# EAGLE board Bolt (EAGLE 9.6.2)
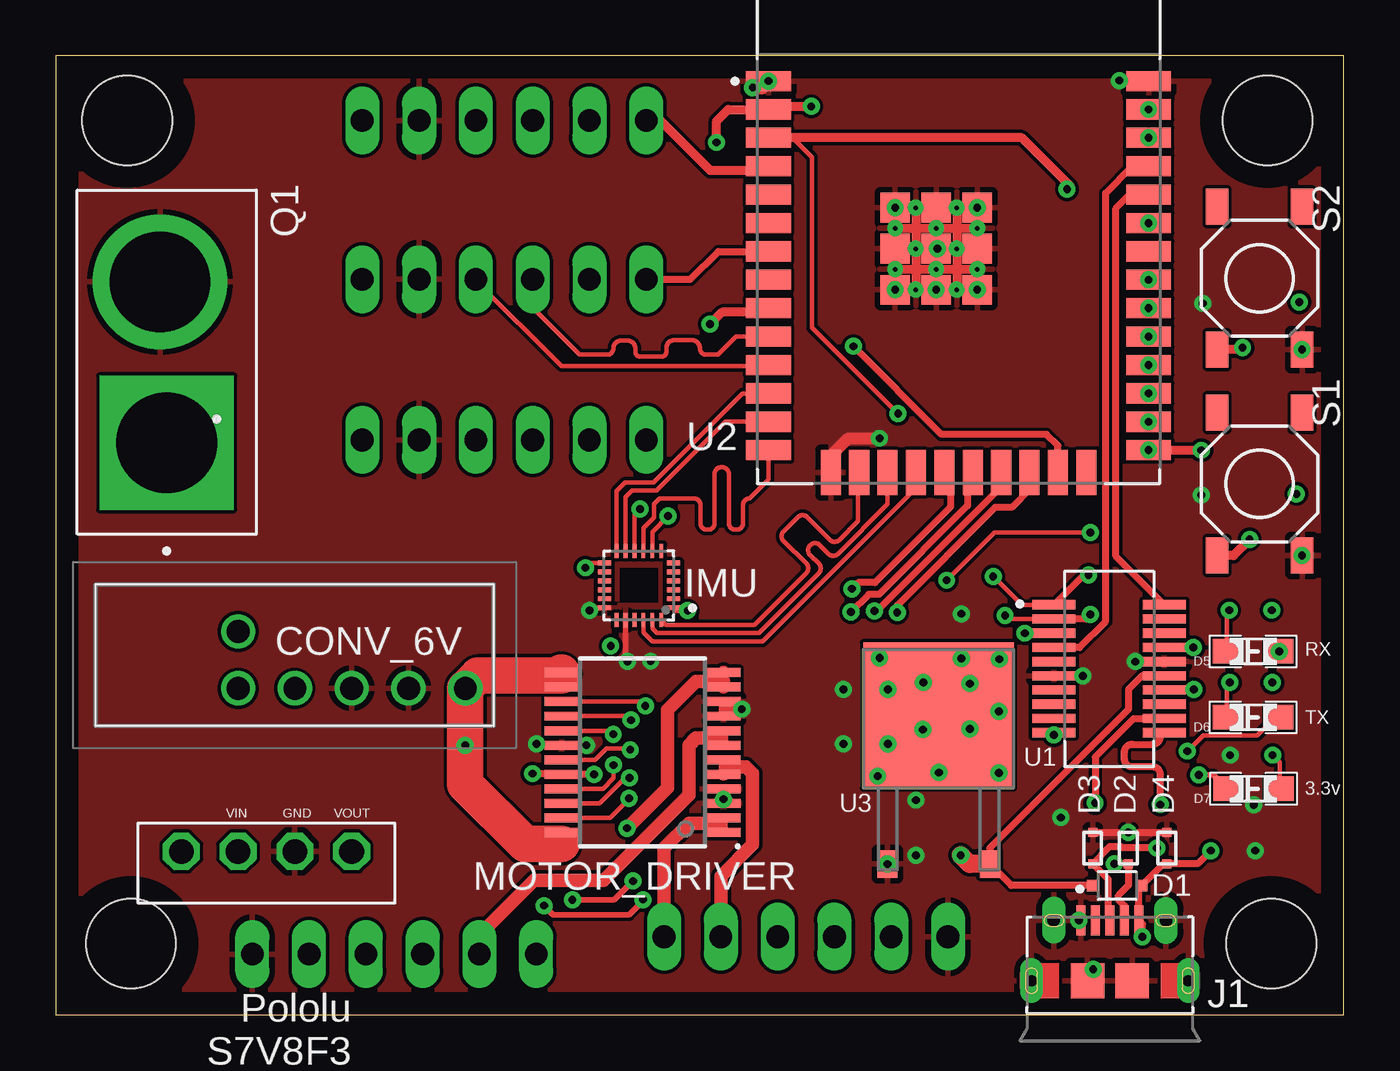
[diagram p0: board, top side]
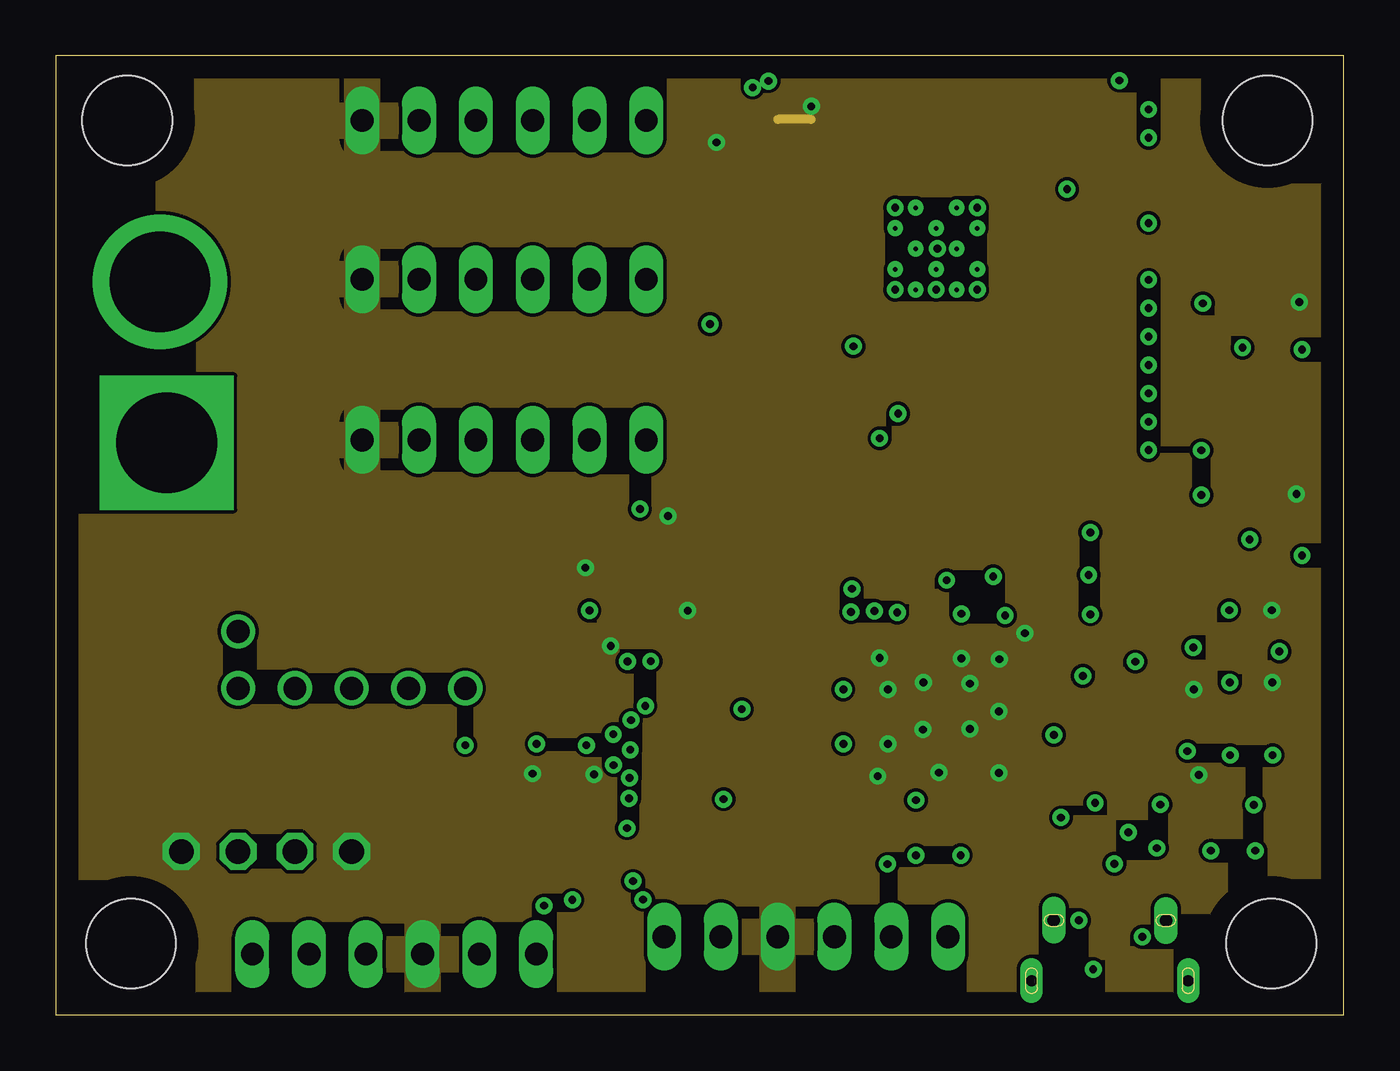
[diagram p1: board, inner layer VCC]
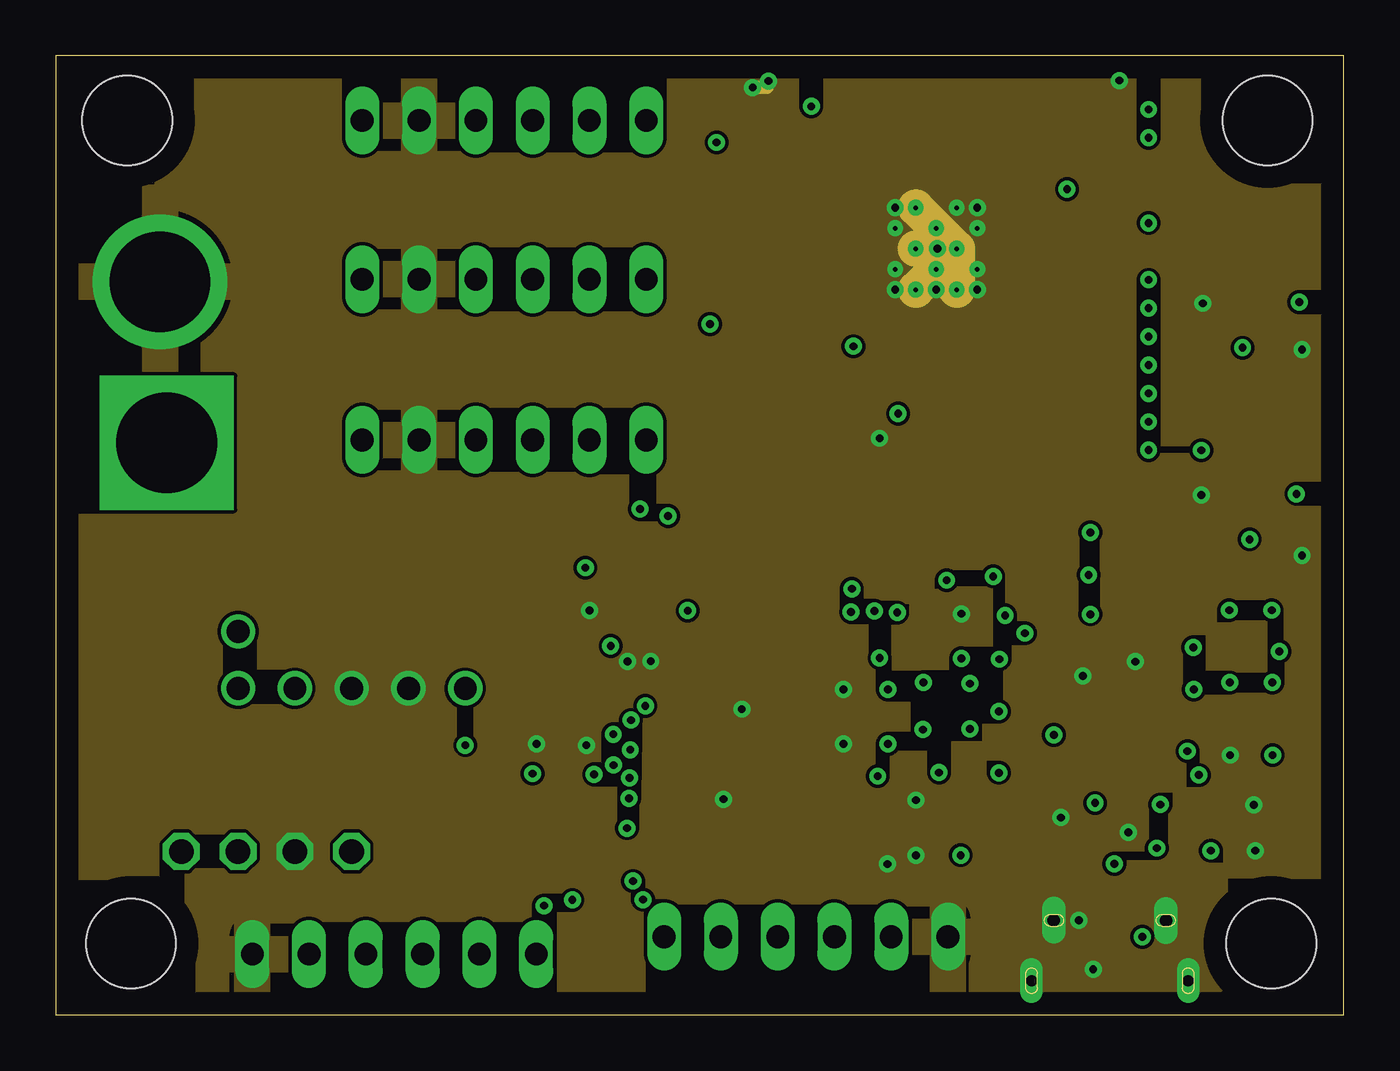
[diagram p2: board, inner layer GND]
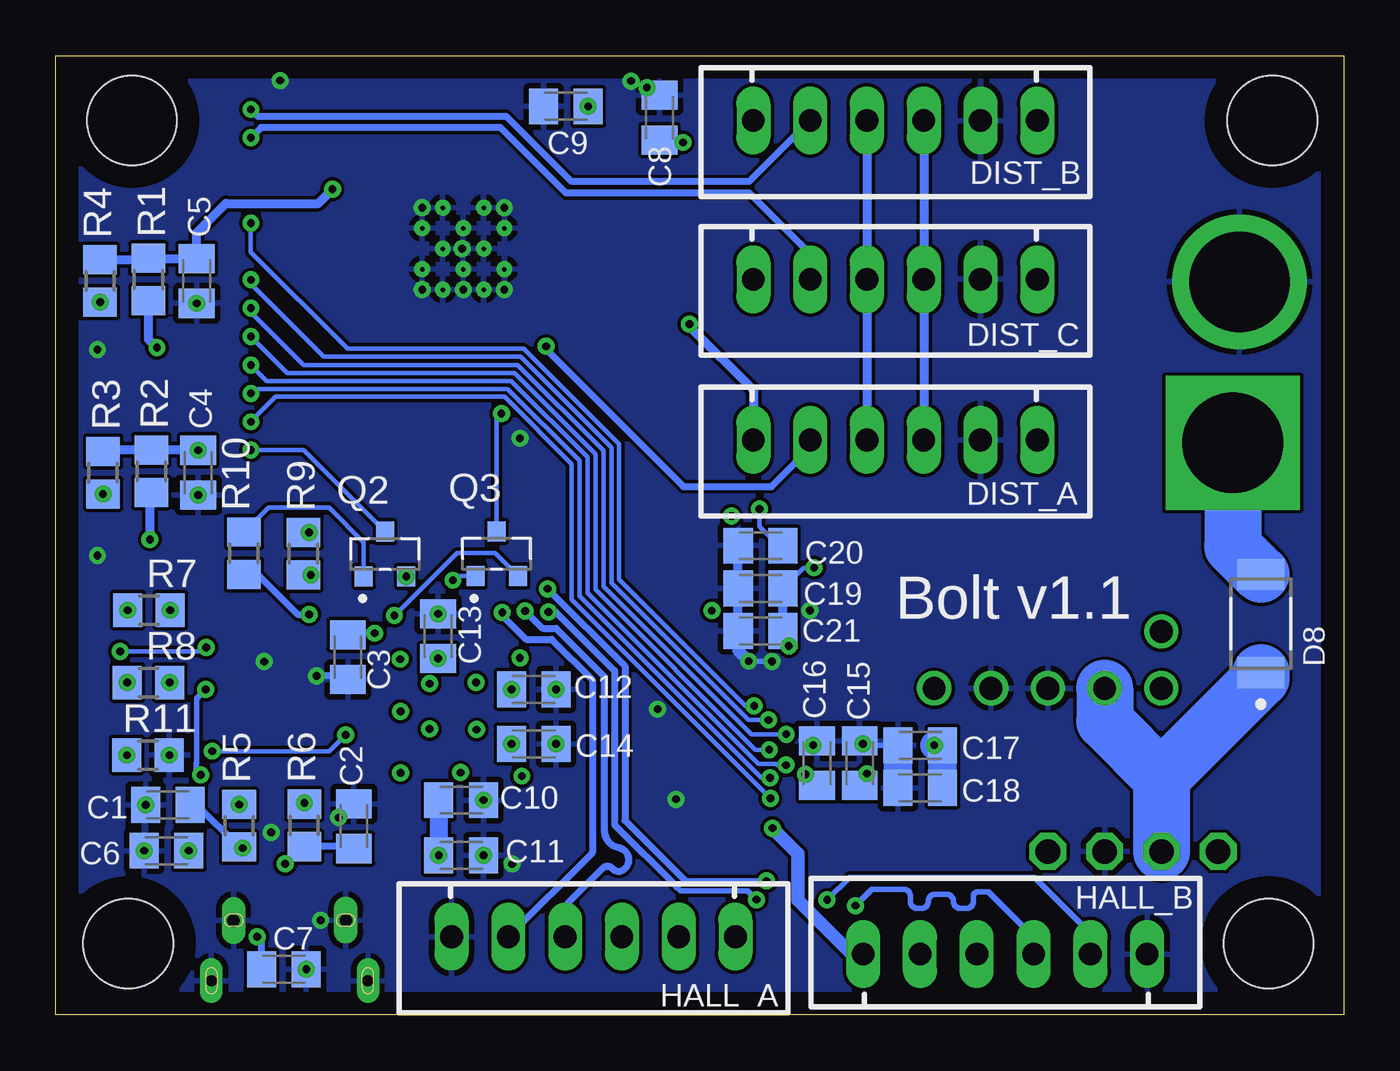
[diagram p3: board, bottom side, seen from below]

Size 57.59 x 42.9 mm. Coordinates in mm from the lower left corner, seen from the top.
Outline: 0,0 57.59,0 57.59,42.9 0,42.9 0,0
Copper layers (1+2*15+16): Top 0.035mm / dielectric 1.5mm / VCC 0.035mm / dielectric 0.15mm / GND 0.035mm / dielectric 0.2mm / Bottom 0.035mm
Design rules "default *": minimum track width 6mil, minimum drill 0.2mm, track to track 6mil, track to pad 6mil, pad to pad 6mil, via to via 6mil, smd to smd 6mil, copper to edge 40mil, drill to drill 6mil, minimum pad ring 10mil, minimum via ring 8mil, stop-mask expansion 4mil, vias tented up to drill 0mil, thermal gap 10mil
Holes 4 mm at 3.35,3.19 3.19,40.01 54.19,40.01 54.35,3.19

## Footprints (pad centres in the part's own frame; a part is rotated, then mirrored left to right if it is on the bottom)
C0805K = smd 1.3 x 1.6: 1 -1,0; 2 1,0
S7V8F3 = drill 1.1 octagon: !SHDN 3.81,0; GND -1.27,0; VIN 1.27,0; VOUT -3.81,0
D36V28FX = drill 1.02 pad 1.53: 1 0,0; 2 0,-2.54; 3 2.54,-2.54; 4 5.08,-2.54; 5 7.62,-2.54; 6 10.16,-2.54
SOD323(F) = smd 0.5 x 0.5: 1 1.1,0; 2 -1.1,0
SOD-523 = smd 0.4 x 0.4: P$1 0,-0.5; P$2 1.4,-0.5
0805.LED = smd 1.25 x 1.1: P$1 -1.175,0; P$2 1.175,0
NEXPERIA_PMEG3050EP,115_0 = smd 1.4 x 2.1: 1 -2.2,0; 2 2.2,0
JST-XH-06-PACKAGE-LONG-PAD = drill 1.016 long: 1 -6.35,0; 2 -3.81,0; 3 -1.27,0; 4 1.27,0; 5 3.81,0; 6 6.35,0
QFN40P300X300X105-24N = smd 0.64 x 0.22: 1 -1.545,1; 2 -1.545,0.6; 3 -1.545,0.2; 4 -1.545,-0.2; 5 -1.545,-0.6; 6 -1.545,-1; 13 1.545,-1; 14 1.545,-0.6; 15 1.545,-0.2; 16 1.545,0.2; 17 1.545,0.6; 18 1.545,1 | smd 0.22 x 0.64: 7 -1,-1.545; 8 -0.6,-1.545; 9 -0.2,-1.545; 10 0.2,-1.545; 11 0.6,-1.545; 12 1,-1.545; 19 1,1.545; 20 0.6,1.545; 21 0.2,1.545; 22 -0.2,1.545; 23 -0.6,1.545; 24 -1,1.545
AMPHENOL_10118194-0001LF = smd 0.4 x 1.35: 1 -1.3,2.7; 2 -0.65,2.7; 3 0,2.7; 4 0.65,2.7; 5 1.3,2.7 | drill 0.55 pad 0.65 long: S1 -2.511,2.706; S2 2.514,2.697 | drill 0.5 pad 0.775 long: S3 -3.5,0; S6 3.5,0 | smd 1.5 x 1.55: S4 -1,0; S5 1,0
SOP65P760X160-24N = smd 1.5 x 0.4: 1 -3.625,3.575; 2 -3.625,2.925; 3 -3.625,2.275; 4 -3.625,1.625; 5 -3.625,0.975; 6 -3.625,0.325; 7 -3.625,-0.325; 8 -3.625,-0.975; 9 -3.625,-1.625; 10 -3.625,-2.275; 11 -3.625,-2.925; 12 -3.625,-3.575; 13 3.625,-3.575; 14 3.625,-2.925; 15 3.625,-2.275; 16 3.625,-1.625; 17 3.625,-0.975; 18 3.625,-0.325; 19 3.625,0.325; 20 3.625,0.975; 21 3.625,1.625; 22 3.625,2.275; 23 3.625,2.925; 24 3.625,3.575
AMASS_XT60PB-M = drill 4.5 pad 6 square: 1 -3.6,0 | drill 4.5 pad 6: 2 3.6,0.305
TRANS_MMSS8050-H-TP = smd 0.9 x 0.8: 1 -1,0.95; 2 -1,-0.95; 3 1,0
R0805 = smd 1.3 x 1.5: 1 -0.95,0; 2 0.95,0
SM08 = smd 1.6 x 1: 1 -3.2,1.9; 2 3.2,1.9; 3 -3.2,-1.9; 4 3.2,-1.9
SOP63P599X175-20N = smd 1.97 x 0.41: 1 -2.47,2.857; 2 -2.47,2.223; 3 -2.47,1.587; 4 -2.47,0.953; 5 -2.47,0.318; 6 -2.47,-0.318; 7 -2.47,-0.953; 8 -2.47,-1.587; 9 -2.47,-2.223; 10 -2.47,-2.857; 11 2.47,-2.857; 12 2.47,-2.223; 13 2.47,-1.587; 14 2.47,-0.953; 15 2.47,-0.318; 16 2.47,0.318; 17 2.47,0.953; 18 2.47,1.587; 19 2.47,2.223; 20 2.47,2.857
MODULE_ESP32-WROOM-32D = smd 2 x 0.9: 1 -8.5,5.26; 2 -8.5,3.99; 3 -8.5,2.72; 4 -8.5,1.45; 5 -8.5,0.18; 6 -8.5,-1.09; 7 -8.5,-2.36; 8 -8.5,-3.63; 9 -8.5,-4.9; 10 -8.5,-6.17; 11 -8.5,-7.44; 12 -8.5,-8.71; 13 -8.5,-9.98; 14 -8.5,-11.25; 25 8.5,-11.25; 26 8.5,-9.98; 27 8.5,-8.71; 28 8.5,-7.44; 29 8.5,-6.17; 30 8.5,-4.9; 31 8.5,-3.63; 32 8.5,-2.36; 33 8.5,-1.09; 34 8.5,0.18; 35 8.5,1.45; 36 8.5,2.72; 37 8.5,3.99; 38 8.5,5.26 | smd 0.9 x 2: 15 -5.715,-12.25; 16 -4.445,-12.25; 17 -3.175,-12.25; 18 -1.905,-12.25; 19 -0.635,-12.25; 20 0.635,-12.25; 21 1.905,-12.25; 22 3.175,-12.25; 23 4.445,-12.25; 24 5.715,-12.25 | smd 1.33 x 1.33: 39_1 -2.835,-0.405; 39_2 -1,-0.405; 39_3 0.835,-0.405; 39_4 -2.835,-2.24; 39_5 -1,-2.24; 39_6 0.835,-2.24; 39_7 -2.835,-4.075; 39_8 -1,-4.075; 39_9 0.835,-4.075 | drill 0.2 pad 0.3: 39_10 -1.917,-0.405; 39_11 -0.083,-0.405; 39_12 -2.835,-1.323; 39_13 -1,-1.323; 39_14 0.835,-1.323; 39_15 -1.917,-2.24; 39_16 -0.083,-2.24; 39_17 -2.835,-3.158; 39_18 -1,-3.158; 39_19 0.835,-3.158; 39_20 -1.917,-4.075; 39_21 -0.083,-4.075
TO228P970X238-3N = smd 0.889 x 1.219: 1 -2.286,-6.502; 3 2.286,-6.502 | smd 6.731 x 6.502: 2 0,0.152

## Placement (x,y rotation side)
C1  47pF  [C0805K]  52.58,9.4 180 bottom
C2  47pF  [C0805K]  44.27,8.44 90 bottom
C3  0.1uF  [C0805K]  44.53,16 270 bottom
C4  1nF  [C0805K]  51.23,24.26 270 bottom
C5  1nF  [C0805K]  51.29,32.83 270 bottom
C6  10uF  [C0805K]  52.65,7.35 180 bottom
C7  0.1uF  [C0805K]  47.39,2.04 0 bottom
C8  0.1uF  [C0805K]  30.59,40.13 90 bottom
C9  22uF  [C0805K]  34.78,40.64 180 bottom
C10  1uF  [C0805K]  39.47,9.61 0 bottom
C11  10uF  [C0805K]  39.47,7.14 0 bottom
C12  0.1uF  [C0805K]  36.21,14.56 0 bottom
C13  1uF  [C0805K]  40.49,16.94 90 bottom
C14  47uF  [C0805K]  36.21,12.12 0 bottom
C15  0.1uF  [C0805K]  21.64,11.27 90 bottom
C16  10uF  [C0805K]  23.55,11.27 90 bottom
C17  0.1uF  [C0805K]  18.94,12.06 180 bottom
C18  10uF  [C0805K]  18.94,10.15 180 bottom
C19  0.1uF  [C0805K]  26.08,19.08 180 bottom
C20  0.1uF  [C0805K]  26.08,20.99 180 bottom
C21  10nF  [C0805K]  26.08,17.18 180 bottom
CONV_3V3  S7V8F3  [S7V8F3]  9.42,7.31 180 top
CONV_6V  D36V28FX  [D36V28FX]  8.15,17.15 0 top
D1  BAT760,115  [SOD323(F)]  47.46,5.79 180 top
D2  ESD5B5.0ST1G  [SOD-523]  47.47,6.76 90 top
D3  ESD5B5.0ST1G  [SOD-523]  45.87,6.76 90 top
D4  ESD5B5.0ST1G  [SOD-523]  49.19,6.76 90 top
D5  RX  [0805.LED]  53.55,16.26 0 top
D6  TX  [0805.LED]  53.55,13.31 0 top
D7  3.3V  [0805.LED]  53.56,10.12 0 top
D8  NEXPERIA_PMEG3050EP,115NEXPERIA_PMEG3050EP,115_0_0  [NEXPERIA_PMEG3050EP,115_0]  3.7,17.5 90 bottom
DIST_A  JST-XH-06-PIN-LONG-PAD  [JST-XH-06-PACKAGE-LONG-PAD]  20.05,25.72 180 bottom
DIST_B  JST-XH-06-PIN-LONG-PAD  [JST-XH-06-PACKAGE-LONG-PAD]  20.05,40.01 180 bottom
DIST_C  JST-XH-06-PIN-LONG-PAD  [JST-XH-06-PACKAGE-LONG-PAD]  20.05,32.91 180 bottom
HALL_A  JST-XH-06-PIN-LONG-PAD  [JST-XH-06-PACKAGE-LONG-PAD]  33.55,3.5 180 bottom
HALL_B  JST-XH-06-PIN-LONG-PAD  [JST-XH-06-PACKAGE-LONG-PAD]  15.13,2.72 0 bottom
IMU  MPU-9250  [QFN40P300X300X105-24N]  26.08,19.21 180 top
J1  10118194-0001LF  [AMPHENOL_10118194-0001LF]  47.14,1.53 0 top
MOTOR_DRIVER  TB6612FNG(O,C,8,EL  [SOP65P760X160-24N]  26.24,11.74 180 top
Q1  XT60_YELLOW  [AMASS_XT60PB-M]  4.96,29.19 90 top
Q2  MMSS8050-H-TP  [TRANS_MMSS8050-H-TP]  42.87,20.62 90 bottom
Q3  MMSS8050-H-TP  [TRANS_MMSS8050-H-TP]  37.88,20.63 90 bottom
R1  220R  [R0805]  53.45,32.89 270 bottom
R2  220R  [R0805]  53.32,24.32 270 bottom
R3  10K  [R0805]  55.48,24.26 90 bottom
R4  10K  [R0805]  55.61,32.83 90 bottom
R5  27R  [R0805]  49.39,8.46 90 bottom
R6  27R  [R0805]  46.49,8.48 90 bottom
R7  10K  [R0805]  53.42,18.1 0 bottom
R8  10K  [R0805]  53.45,14.87 0 bottom
R9  10K  [R0805]  46.52,20.64 270 bottom
R10  10K  [R0805]  49.17,20.65 90 bottom
R11  1K  [R0805]  53.47,11.62 180 bottom
S1  PTS525SM08  [SM08]  53.83,23.75 90 top
S2  PTS525SM08  [SM08]  53.83,32.96 90 top
U1  FT231XS-R  [SOP63P599X175-20N]  47.1,15.49 0 top
U2  ESP32-WROOM-32D  [MODULE_ESP32-WROOM-32D]  40.37,36.51 0 top
U3  LM1117DT-3.3/NOPB  [TO228P970X238-3N]  39.48,13.25 0 top

## Library data of the parts
C1-C21 = rcl; SPICEPREFIX: C
CONV_3V3 = Pololu_S7V8F3
CONV_6V = D36V28FX; DESCRIPTION: 5V, 3.2A Step-Down Voltage Regulator D36V28F5; HEIGHT: 8.77mm; MANUFACTURER_NAME: POLOLU ROBOTICS & ELECTRONICS; MANUFACTURER_PART_NUMBER: D36V28FX
D1 = BAT760_115; AVAILABILITY: Good; DESCRIPTION: Diode Schottky 20V 1A (DC) Surface Mount SOD-323; MF: Nexperia USA; MP: BAT760,115; PACKAGE: SOD323-2 Nexperia USA Inc.; PRICE: None; PURCHASE-URL: https://pricing.snapeda.com/search/part/BAT760,115/?ref=eda
D2-D4 = ESD5B5.0ST1G; AVAILABILITY: Good; DESCRIPTION: Diode Schottky 20V 1A (DC) Surface Mount SOD-323; MF: Nexperia USA; MP: BAT760,115; PACKAGE: SOD323-2 Nexperia USA Inc.; PRICE: None; PURCHASE-URL: https://pricing.snapeda.com/search/part/BAT760,115/?ref=eda
D5-D7 = leds
D8 = Nexperia - PMEG3050EP,115; AMBIENT_TEMPERATURE_RANGE_HIGH: +150°C; AMBIENT_TEMPERATURE_RANGE_LOW: -55°C; CENTROID_NOT_SPECIFIED: No; DATASHEET: https://assets.nexperia.com/documents/data-sheet/PMEG3050EP.pdf; DEVICE_CLASS_L1: Discrete Semiconductors; DEVICE_CLASS_L2: Diodes; DEVICE_CLASS_L3: Schottky Diodes; DIGIKEY_DESCRIPTION: DIODE SCHOTTKY 30V 5A SOD128; DIGIKEY_PART_NUMBER: 1727-5317-1-ND; FORWARD_CURRENT: 5A; HEIGHT: 1.1mm; LEAD_FREE: yes; MAX_JUNCTION_TEMP: +150°C; MAX_SURGE_FORWARD_CURRENT: 70A; MF: Nexperia; MFG_PACKAGE_IDENT: SOD128; MFG_PACKAGE_IDENT_DATE: 06/2017; MFG_PACKAGE_IDENT_REV: 0; MOUSER_PART_NUMBER: 771-PMEG3050EP115; MPN: PMEG3050EP,115; PACKAGE: CFP5; PEAK_REVERSE_CURRENT: 8mA; PREFIX: D; REVERSE_VOLTAGE: 30V; ROHS: yes; VERIFICATION_VERSION: 0.0.0.1
DIST_A DIST_B DIST_C HALL_A HALL_B = Rembrandt Electronics - JST XH Connectors v1-0
IMU = MPU-9250; AVAILABILITY: Bad; DESCRIPTION: Accelerometer, Gyroscope, Magnetometer, 9 Axis Sensor I²C, SPI Output; MF: TDK InvenSense; MP: MPU-9250; PACKAGE: TFQFN-24 TDK InvenSense; PRICE: None
J1 = 10118194-0001LF; AVAILABILITY: Good; DESCRIPTION: USB - micro B USB 2.0 Receptacle Connector 5 Position Surface Mount, Right Angle; Through Hole; MF: Amphenol ICC (FCI); MP: 10118194-0001LF; PACKAGE: None; PRICE: None; PURCHASE-URL: https://pricing.snapeda.com/search/part/10118194-0001LF/?ref=eda
MOTOR_DRIVER = TB6612FNG_O_C_8_EL; AVAILABILITY: Good; DESCRIPTION: Motor Driver Power MOSFET Parallel 24-SSOP; MF: Toshiba; MP: TB6612FNG(O,C,8,EL; PACKAGE: SSOP-24 Toshiba; PRICE: None
Q1 = XT60_YELLOW; AVAILABILITY: Unavailable; DESCRIPTION: Power connector; 65A; PIN: 2; Colour: yellow; MF: Pololu; MP: XT60 YELLOW; PACKAGE: None; PRICE: None
Q2 Q3 = MMSS8050-H-TP; AVAILABILITY: Good; DESCRIPTION: Bipolar (BJT) Transistor NPN 25V 1.5A 100MHz 625mW Surface Mount SOT-23; MF: Micro Commercial; MP: MMSS8050-H-TP; PACKAGE: SOT-23 MCC; PRICE: None; PURCHASE-URL: https://pricing.snapeda.com/search/part/MMSS8050-H-TP/?ref=eda
R1-R11 = rcl; SPICEPREFIX: R
S1 S2 = pts525_20; MF: C&K Components; MPN: PTS525SM08SMTR2LFS; OC_FARNELL: unknown; OC_NEWARK: unknown
U1 = FT231XS-R; DESCRIPTION: USB Bridge, USB to UART USB 2.0 UART Interface 20-SSOP; DIGI-KEY_PART_NUMBER: 768-1129-1-ND; MF: FTDI,; MP: FT231XS-R; PACKAGE: SSOP-20 FTDI; PURCHASE-URL: https://pricing.snapeda.com/search/part/FT231XS-R/?ref=eda
U2 = ESP32-WROOM-32D; AVAILABILITY: Bad; DESCRIPTION: Bluetooth, WiFi 802.11b/g/n, Bluetooth v4.2 +EDR, Class 1, 2 and 3 Transceiver Module 2.4GHz ~ 2.5GHz Integrated, Trace Surface Mount; MF: Espressif Systems; MP: ESP32-WROOM-32D; PACKAGE: Module Espressif Systems; PRICE: None
U3 = LM1117DT-3.3_NOPB; AVAILABILITY: Good; DESCRIPTION: 800-mA 15-V linear voltage regulator 3-TO-252 0 to 125; MF: Texas Instruments; MP: LM1117DT-3.3/NOPB; PACKAGE: TO-252-3 Texas Instruments; PRICE: None; PURCHASE-URL: https://pricing.snapeda.com/search/part/LM1117DT-3.3/NOPB/?ref=eda

## Nets
3V3OUT: U1.13
6V: C17.1 C18.1 CONV_6V.6 MOTOR_DRIVER.13 MOTOR_DRIVER.14 MOTOR_DRIVER.24
BAT: D8.2 Q1.1
DIST_GPIO1_A: DIST_A.6 U2.9
DIST_GPIO1_B: DIST_B.6 U2.4
DIST_GPIO1_C: DIST_C.6 U2.7
DIST_XSHUT_A: DIST_A.5 U2.23
DIST_XSHUT_B: DIST_B.5 U2.37
DIST_XSHUT_C: DIST_C.5 U2.36
DTR: Q2.2 R9.2 U1.1
EN: C5.1 Q3.3 R1.1 R4.2 U2.3
EXT_5V: C10.1 C11.1 D1.1 U1.15 U3.3
GND: C1.2 C2.2 C3.2 C4.2 C5.2 C6.2 C7.2 C8.2 C9.2 C10.2 C11.2 C12.2 C13.2 C14.2 C15.2 C16.2 C17.2 C18.2 C19.2 C20.2 C21.2 CONV_3V3.GND CONV_6V.4 CONV_6V.5 D2.P$2 D3.P$2 D4.P$2 DIST_A.2 DIST_B.2 DIST_C.2 HALL_A.6 HALL_B.6 IMU.18 IMU.20 J1.1 J1.S1 J1.S2 J1.S3 J1.S4 J1.S5 J1.S6 MOTOR_DRIVER.3 MOTOR_DRIVER.4 MOTOR_DRIVER.9 MOTOR_DRIVER.10 MOTOR_DRIVER.18 Q1.2 R11.1 S1.3 S2.3 U1.6 U1.16 U2.1 U2.15 U2.38 U2.39_1 U2.39_2 U2.39_3 U2.39_4 U2.39_5 U2.39_6 U2.39_7 U2.39_8 U2.39_9 U2.39_10 U2.39_11 U2.39_12 U2.39_13 U2.39_14 U2.39_15 U2.39_16 U2.39_17 U2.39_18 U2.39_19 U2.39_20 U2.39_21 U3.1
HALL_1_A: HALL_A.4 U2.21
HALL_1_B: HALL_B.4 U2.20
HALL_2_A: HALL_A.5 U2.22
HALL_2_B: HALL_B.5 U2.19
I2C_SCL: DIST_A.4 DIST_B.4 DIST_C.4 U2.10
I2C_SDA: DIST_A.3 DIST_B.3 DIST_C.3 U2.11
IMU_CLK: IMU.23 U2.17
IMU_CS: IMU.22 U2.18
IMU_FSYNC: IMU.11 U2.13
IMU_INT: IMU.12 U2.12
IMU_SDI: IMU.24 U2.16
IMU_SDO: IMU.9 U2.14
IO0: C4.1 Q2.3 R2.1 R3.2 U2.25
M1_A: HALL_A.1 MOTOR_DRIVER.1 MOTOR_DRIVER.2
M1_B: HALL_B.1 MOTOR_DRIVER.11 MOTOR_DRIVER.12
M2_A: HALL_A.2 MOTOR_DRIVER.5 MOTOR_DRIVER.6
M2_B: HALL_B.2 MOTOR_DRIVER.7 MOTOR_DRIVER.8
M_DRV_AIN1: MOTOR_DRIVER.21 U2.28
M_DRV_AIN2: MOTOR_DRIVER.22 U2.27
M_DRV_BIN1: MOTOR_DRIVER.17 U2.30
M_DRV_BIN2: MOTOR_DRIVER.16 U2.31
M_DRV_PWMA: MOTOR_DRIVER.23 U2.26
M_DRV_PWMB: MOTOR_DRIVER.15 U2.33
M_DRV_STBY: MOTOR_DRIVER.19 U2.29
N$1: Q2.1 R10.2
N$28: D7.P$2 R11.2
N$35: D5.P$1 R7.2
N$55: R5.2 U1.11
N$56: R6.2 U1.12
N$61: R2.2 S1.1
N$62: R1.2 S2.1
N$124: Q3.1 R9.1
N$126: D5.P$2 U1.17
N$127: D6.P$2 U1.10
N$129: D6.P$1 R8.2
REGOUT: C20.1 IMU.10
RTS: Q3.2 R10.1 U1.2
RXD0: U1.20 U2.34
TXD0: U1.4 U2.35
USB_5V: C6.1 C7.1 D1.2 D4.P$1 J1.5
USB_DM: C2.1 D2.P$1 J1.4 R6.1
USB_DP: C1.1 D3.P$1 J1.3 R5.1
V_BAT: CONV_3V3.VIN CONV_6V.3 D8.1
VCC: C3.1 C8.1 C9.1 C12.1 C13.1 C14.1 C15.1 C16.1 C19.1 C21.1 CONV_3V3.!SHDN CONV_3V3.VOUT D7.P$1 DIST_A.1 DIST_B.1 DIST_C.1 HALL_A.3 HALL_B.3 IMU.1 IMU.8 IMU.13 MOTOR_DRIVER.20 R3.1 R4.1 R7.1 R8.1 U1.3 U1.14 U2.2 U3.2

## Tracks (layer width: path | path; a pad name or v marks a point on that pad's centre or on a via)
6V  (via drill 0.35)
  Top 0.508: MOTOR_DRIVER.24 22.61,7.65 | MOTOR_DRIVER.14 MOTOR_DRIVER.13
  Top 1.626: 22.61,7.65 20.97,7.65 18.31,10.31 v18.31,12.06 CONV_6V.6 18.88,15.18 22.61,15.18 MOTOR_DRIVER.13
  Bottom 1.27: C18.1 C17.1 17.94,12.06 v18.31,12.06
BAT
  Bottom 2.54: Q1.1 4.96,20.96 D8.2
DIST_GPIO1_A  (via drill 0.35)
  Top 0.406: U2.9 31.69,31.43 29.79,31.43 v29.26,30.9
  Bottom 0.406: v29.26,30.9 29.26,30.8 26.4,27.94 DIST_A.6
DIST_GPIO1_B
  Top 0.406: DIST_B.6 27.04,40.01 29.26,37.78 31.69,37.78 U2.4
DIST_GPIO1_C
  Top 0.305: DIST_C.6 28.38,32.91 29.63,34.15 U2.7
DIST_XSHUT_A  (via drill 0.35)
  Top 0.305: U2.23 44.81,25.46 44.31,25.97 39.61,25.97 v35.67,29.91
  Bottom 0.305: DIST_A.5 23.86,25.35 25.58,23.63 29.52,23.63 35.67,29.78 v35.67,29.91
DIST_XSHUT_B  (via drill 0.35)
  Bottom 0.305: DIST_B.5 26.59,37.27 34.53,37.27 37.45,40.2 48.56,40.2 U2.37
  other vias: 48.87,40.5
DIST_XSHUT_C  (via drill 0.35)
  Bottom 0.305: DIST_C.5 23.86,34.05 26.58,36.77 34.78,36.77 37.7,39.69 48.41,39.69 U2.36
  other vias: 48.87,39.23
DTR  (via drill 0.35)
  Top 0.203: Q2.2 43.2,18.34 U1.1
  Top 0.305: U1.1 45.97,19.69 v46.19,19.69
  Bottom 0.305: v46.19,19.69 R9.2
  other vias: 41.92,19.62
EN  (via drill 0.35)
  Top 0.203: v37.67,26.9 33.82,30.75 33.82,38.37 32.95,39.23 32.34,39.23
  Top 0.406: v45.22,36.93 45.36,37.07 43.2,39.23 32.34,39.23 U2.3
  Bottom 0.203: Q3.3 37.88,26.69 v37.67,26.9
  Bottom 0.406: R4.2 53.52,33.78 R1.1 53.44,33.83 C5.1 51.29,35 50,36.29 45.86,36.29 v45.22,36.93
EXT_5V  (via drill 0.35)
  Top 0.305: D1.1 42.73,5.79 U3.3 41.76,7.47 47.96,13.67 47.96,14.56 48.57,15.17 U1.15
  Top 0.813: U3.3 40.86,6.75 C11.1
  Bottom 0.813: C10.1 C11.1
  other vias: 40.47,7.14
GND  (via drill 0.35)
  Top 0.203: J1.S4 46.14,1.79 C7.2
  Top 0.254: MOTOR_DRIVER.3 v29.86,9.65 MOTOR_DRIVER.4 | MOTOR_DRIVER.10 29.86,13.68 30.18,13.68 | v30.68,13.68 30.18,13.68 | MOTOR_DRIVER.9 30.18,13.68 | IMU.18 23.98,18.21 v23.86,18.1 | IMU.20 25.49,15.9 v25.57,15.81 | MOTOR_DRIVER.18 21.56,12.06 v21.5,12.12
  Top 0.305: D3.P$2 D2.P$2 D4.P$2 | J1.1 v45.76,4.23 | v45.93,15.17 U1.6 | U1.16 v48.28,15.8
  Top 0.406: U2.39_5 v39.42,34.27 | MOTOR_DRIVER.9 MOTOR_DRIVER.10 | v47.56,41.8 48.85,41.8 U2.38 | U2.39_11 U2.39_3 U2.39_14 | U2.39_10 U2.39_1 U2.39_12 | U2.39_10 U2.39_2 | U2.39_2 U2.39_11 | U2.39_12 U2.39_13 | U2.39_13 U2.39_14 | U2.39_14 U2.39_6 U2.39_19 | U2.39_19 U2.39_9 U2.39_21 40.17,32.44 | 40.17,32.44 U2.39_8 | U2.39_8 U2.39_20 | U2.39_20 U2.39_7 U2.39_17 | U2.39_17 U2.39_4 U2.39_12 | U2.39_10 U2.39_15 U2.39_20 | U2.39_8 U2.39_18 | U2.39_18 U2.39_5 | U2.39_5 U2.39_13 | U2.39_13 U2.39_2 | U2.39_11 U2.39_16 40.29,32.56 40.17,32.44 | U2.39_17 U2.39_18 | U2.39_18 U2.39_19
  Top 0.508: U2.15 34.66,25.02 35.43,25.79 v36.84,25.79
  Top 0.61: U2.1 31.45,41.77 v31.16,41.48 31.58,41.48 U2.1
  GND 0.406: U2.1 31.87,41.58 31.8,41.5
  GND 0.61: v31.16,41.48 31.18,41.5 31.8,41.5
  GND 1.626: U2.39_15 v39.42,34.27 U2.39_16 | U2.39_10 U2.39_16 | U2.39_16 U2.39_21 U2.39_18 U2.39_20
  Bottom 0.203: 19.94,11.75 C17.2
  Bottom 0.254: C2.2 44.34,9.44 v44.95,8.83 | v21.5,12.12 C15.2 21.44,12.06 C17.2 | v26.6,15.82 v26.59,15.81 v25.57,15.81
  Bottom 0.305: C1.2 | C3.2 44.7,15.17 v45.93,15.17
  Bottom 0.406: v23.72,12.06 23.72,12.09 C16.2 | C21.2 C19.2 C20.2
  Bottom 0.508: C21.2 27.08,16.3 v26.6,15.82
  Bottom 0.61: C8.2 30.94,41.48 v31.16,41.48
  Bottom 1.27: C18.2 19.94,11.75
  other vias: 51.29,31.83 31.87,41.77 37.53,36.11 37.53,32.44 39.37,32.44 41.2,32.44 55.73,29.76 51.23,23.26 55.73,20.55 46.39,2.04 52.52,11.62 53.65,7.35 53.58,9.4 47.97,8.16 38.47,9.61 38.47,7.14 37.19,6.75 35.21,14.56 35.21,12.12 40.49,17.94 41.2,36.11
  pour GND: -0.27,42.86 58.15,42.86 58.15,-0.32 -0.27,-0.32
  pour Bottom: -0.27,42.86 58.15,42.86 58.15,-0.32 -0.27,-0.32
  pour Top: -0.27,42.86 58.15,42.86 58.15,-0.32 -0.27,-0.32
HALL_1_A  (via drill 0.35)
  Top 0.305: U2.21 42.27,23.63 36.73,18.08 v36.61,18.08
  Bottom 0.305: v36.61,18.08 35.82,17.29 35.21,17.29 33.06,15.14 33.06,8.25 arc-80 32.43,7.49 arc130 32.18,6.52 arc90 32.66,6.52 32.71,6.57 arc-90 33.13,6.57 34.64,5.06 arc-90 34.64,4.77 34.53,4.65 arc90 34.53,4.17 34.82,3.88 HALL_A.4
HALL_1_B  (via drill 0.35)
  Top 0.254: v21.83,4.89 22.23,4.49 25.64,4.49 26.26,5.11 v26.26,5.16
  Top 0.305: v35.56,18.03 36.35,18.81 36.81,18.81 40.78,22.78 40.78,24.03 U2.20
  Bottom 0.254: v21.83,4.89 21.09,5.63 19.69,5.63 arc90 19.38,5.31 19.38,5.08 arc-90 19.06,4.76 18.89,4.76 arc-90 18.58,5.08 arc90 18.26,5.4 17.76,5.4 arc90 17.45,5.08 arc-90 17.13,4.76 16.88,4.76 arc-90 16.56,5.08 16.56,5.31 arc90 16.37,5.5 15.89,5.5 13.86,3.48 HALL_B.4 | v26.26,5.16 26.66,5.56 29.65,5.56 29.82,5.73
  Bottom 0.305: v35.56,18.03 35.23,18.03 32.6,15.39 32.6,8.51 29.82,5.73
HALL_2_A  (via drill 0.35)
  Top 0.305: U2.22 43.56,24.24 43.56,23.52 42.75,22.7 42,22.7 37.63,18.33 v37.63,18
  Bottom 0.305: HALL_A.5 33.6,7.26 33.6,14.98 35.42,16.8 36.56,16.8 37.63,17.87 v37.63,18
HALL_2_B  (via drill 0.35)
  Top 0.254: v23.1,5.14 24.96,5.14 v25.81,5.99
  Top 0.305: U2.19 40.01,23.98 40.01,22.72 36.64,19.34 35.87,19.34 v35.59,19.06
  Bottom 0.254: v23.1,5.14 22.08,6.16 13.83,6.16 11.32,3.66 HALL_B.5 | v25.81,5.99 29.43,5.99
  Bottom 0.305: v35.59,19.06 32.14,15.61 32.14,8.7 29.43,5.99
I2C_SCL
  Top 0.203: U2.10 30.42,30.34 29.61,29.53 29.09,29.53 arc-90 28.8,29.82 arc90 28.43,30.19 27.67,30.19 arc90 27.3,29.82 27.3,29.66 arc-90 27.09,29.45 26.13,29.45 arc-90 25.91,29.66 25.91,29.82 arc90 25.57,30.16 25.28,30.16 arc90 24.94,29.82 arc-90 24.64,29.53 23.43,29.53 21.32,31.64 DIST_C.4
  Bottom 0.406: DIST_B.4 DIST_C.4 DIST_A.4
I2C_SDA
  Top 0.203: U2.11 31.82,29.02 22.61,29.02 18.78,32.85 DIST_C.3
  Bottom 0.406: DIST_B.3 DIST_C.3 DIST_A.3
IMU_CLK
  Top 0.203: IMU.23 26.69,17.28 26.88,17.09 31.44,17.09 34.12,19.77 arc90 34.12,20.19 33.72,20.58 arc-90 33.72,21 33.74,21.02 arc-90 34.16,21.02 34.55,20.62 arc90 34.97,20.62 37.2,22.85 U2.17
IMU_CS
  Top 0.203: IMU.22 26.28,17.12 26.68,16.71 31.02,16.71 31.61,16.71 38.62,23.72 38.62,24.11 U2.18
IMU_FSYNC
  Top 0.203: U2.13 29.94,26.53 26.87,23.46 25.77,23.46 25.48,23.17 IMU.11
IMU_INT
  Top 0.203: IMU.12 25.08,23.44 25.45,23.81 26.72,23.81 30.71,27.8 U2.12
IMU_SDI
  Top 0.203: IMU.24 27.29,17.45 31.24,17.45 33.56,19.77 arc90 33.56,20.19 32.54,21.21 arc-90 32.54,21.62 33.19,22.27 arc-90 33.6,22.27 34.62,21.25 arc90 35.04,21.25 35.87,22.09 35.87,24.21 U2.16
IMU_SDO
  Top 0.203: IMU.9 26.28,21.78 26.75,22.26 26.75,22.86 26.99,23.1 28.53,23.1 arc-90 28.82,22.81 28.82,22 arc90 29.12,21.7 29.17,21.7 arc90 29.46,22 29.46,24.21 arc-90 29.75,24.5 29.8,24.5 arc-90 30.1,24.21 30.1,22 arc90 30.39,21.7 30.44,21.7 arc90 30.73,22 30.73,22.81 arc-90 31.02,23.1 31.87,23.95 U2.14
IO0  (via drill 0.35)
  Top 0.406: U2.25 C4.1
  Bottom 0.203: Q2.3 46.51,25.26 U2.25
  Bottom 0.406: C4.1 53.31,25.26 R2.1 55.42,25.27 R3.2
  other vias: 51.23,25.26 48.87,25.26
M1_A
  Top 0.406: MOTOR_DRIVER.2 MOTOR_DRIVER.1 29.62,8.41
  Top 0.61: HALL_A.1 27.2,7.46 28.3,8.57 29.62,8.57 29.62,8.41
M1_B  (via drill 0.35)
  Top 0.406: MOTOR_DRIVER.11 MOTOR_DRIVER.12
  Top 0.61: MOTOR_DRIVER.12 29.47,14.92 | 29.47,14.92 29.61,14.92 | 29.61,14.92 MOTOR_DRIVER.11 29.86,14.92 29.61,14.92 | 29.47,14.92 28.62,14.92 27.35,13.65 27.35,10.16 v25.55,8.35
  Bottom 0.61: HALL_B.1 21.99,2.72 24.4,5.14 24.4,7.21 v25.55,8.35
M2_A
  Top 0.406: MOTOR_DRIVER.6 29.86,10.78 MOTOR_DRIVER.5
  Top 0.61: HALL_A.2 29.74,6.2 31.16,7.62 31.16,10.8 30.86,11.1 30.18,11.1 29.86,10.78
M2_B
  Top 0.254: MOTOR_DRIVER.8 29.53,12.38 29.26,12.38
  Top 0.406: MOTOR_DRIVER.8 MOTOR_DRIVER.7 29.57,12.06 29.46,12.18
  Top 0.61: 29.46,12.18 29.26,12.38 28.62,12.38 28.3,12.06 28.3,9.84 24.48,6.02 21.38,6.02 18.94,3.58 HALL_B.2
M_DRV_AIN1  (via drill 0.35)
  Top 0.203: MOTOR_DRIVER.21 24.46,10.12 24.95,10.6 v24.95,11.18
  Bottom 0.203: v24.95,11.18 25.34,11.18 25.39,11.23 26.17,11.23 33.82,18.88 33.82,24.95 37.23,28.36 48.16,28.36 U2.28
  other vias: 48.87,29.07
M_DRV_AIN2  (via drill 0.35)
  Top 0.203: MOTOR_DRIVER.22 24.32,9.46 25.45,10.6 v25.65,10.6
  Bottom 0.203: v25.65,10.6 26.04,10.6 34.17,18.73 34.17,24.8 37.38,28.01 48.67,28.01 U2.27
  other vias: 48.87,27.8
M_DRV_BIN1  (via drill 0.35)
  Top 0.203: v24.93,12.56 24.77,12.71 MOTOR_DRIVER.17
  Bottom 0.203: v24.93,12.56 26.49,12.56 33.11,19.17 33.11,25.24 36.94,29.07 46.51,29.07 48.87,31.43 U2.30
  other vias: 48.87,31.61
M_DRV_BIN2  (via drill 0.35)
  Top 0.203: v25.71,13.19 25.54,13.37 MOTOR_DRIVER.16
  Bottom 0.203: v25.71,13.19 26.62,13.19 32.75,19.32 32.75,25.39 36.82,29.45 45.62,29.45 48.87,32.7 U2.31
  other vias: 48.87,32.88
M_DRV_PWMA  (via drill 0.35)
  Top 0.203: MOTOR_DRIVER.23 24.78,8.81 25.64,9.67 v25.64,9.69
  Bottom 0.203: v25.64,9.69 34.53,18.58 34.53,24.65 37.53,27.65 47.75,27.65 U2.26
  other vias: 48.87,26.53
M_DRV_PWMB  (via drill 0.35)
  Top 0.203: v26.36,13.83 26.17,14.02 MOTOR_DRIVER.15
  Bottom 0.203: v26.36,13.83 26.75,13.83 32.39,19.47 32.39,25.53 36.67,29.81 44.55,29.81 48.87,34.13 U2.33
  other vias: 48.87,35.42
M_DRV_STBY  (via drill 0.35)
  Top 0.203: MOTOR_DRIVER.19 24.11,11.42 24.62,11.93 25.63,11.93 v25.69,11.86
  Bottom 0.203: v25.69,11.86 26.3,11.86 33.46,19.03 33.46,25.09 37.09,28.72 47.24,28.72 U2.29
  other vias: 48.87,30.34
N$1
  Bottom 0.203: Q2.1 43.82,21.14 45.37,22.69 48.08,22.69 R10.2
N$28  (via drill 0.35)
  Top 0.203: R11.2 54.73,11.3 D7.P$2
  other vias: 54.42,11.62
N$35  (via drill 0.35)
  Top 0.203: R7.2 52.37,18 D5.P$1
  other vias: 52.47,18.1
N$55  (via drill 0.35)
  Top 0.305: R5.2 49.39,10.76 arc90 49.05,11.1 48.13,11.1 arc-90 47.78,11.44 47.78,11.76 arc-90 48.13,12.11 49.05,12.11 arc90 49.39,12.45 U1.11
  other vias: 49.39,9.41
N$56  (via drill 0.35)
  Top 0.305: v46.48,9.48 46.48,11.54 48.2,13.26 U1.12
  Bottom 0.305: R6.2 46.49,9.47 v46.48,9.48
N$61  (via drill 0.35)
  Top 0.406: v53.39,21.27 52.66,20.55 S1.1
  Bottom 0.406: R2.2 53.39,23.31 v53.39,21.27
N$62  (via drill 0.35)
  Top 0.406: v53.07,29.84 52.98,29.76 S2.1
  Bottom 0.406: R1.2 53.45,30.23 v53.07,29.84
N$124  (via drill 0.35)
  Top 0.203: v39.84,19.44 41.98,21.59 v46.27,21.59
  Bottom 0.203: Q3.1 39.65,19.63 v39.84,19.44 | v46.27,21.59 R9.1
N$126  (via drill 0.35)
  Top 0.203: v50.87,16.44 U1.17
  Bottom 0.203: D5.P$2 51.04,16.26 v50.87,16.44
  other vias: 54.72,16.26
N$127  (via drill 0.35)
  Top 0.203: D6.P$2 54.54,13.31 53.73,12.51 51.32,12.51 v50.61,11.8 | v44.63,12.53 U1.10
  Bottom 0.203: v50.61,11.8 45.36,11.8 v44.63,12.53
N$129  (via drill 0.35)
  Top 0.203: D6.P$1 52.37,14.74 R8.2
  other vias: 52.5,14.87
REGOUT  (via drill 0.35)
  Top 0.203: IMU.10 25.88,22.39 v26.12,22.64
  Bottom 0.203: v26.12,22.64 26.12,21.84 25.27,20.99 C20.1
RTS  (via drill 0.35)
  Top 0.203: U1.2 42.6,17.72 v42.45,17.87
  Top 0.305: U1.2 46.09,17.71 46.26,17.88 v46.26,17.92
  Bottom 0.203: Q3.2 37.96,20.66 39.66,20.66 v42.45,17.87
  Bottom 0.305: v46.26,17.92 46.79,17.92 48.56,19.7 R10.1
RXD0
  Top 0.305: U1.20 47.41,20.51 47.41,36.08 48.02,36.69 U2.34
TXD0
  Top 0.305: U1.4 45.78,16.44 46.95,17.6 46.95,36.77 48.14,37.96 U2.35
USB_5V  (via drill 0.35)
  Top 0.305: v48.59,3.49 48.59,4.08 J1.5 48.44,5.66 D1.2 49.54,6.76 D4.P$1 51.06,6.76 C6.1
  Bottom 0.305: C7.1 48.39,3.29 v48.59,3.49
  other vias: 51.65,7.35
USB_DM  (via drill 0.35)
  Top 0.305: v47.33,6.76 D2.P$1 47.97,5.8 47.52,5.35 47.52,5.16 47.79,4.89 J1.4
  Bottom 0.305: C2.1 44.36,7.53 R6.1 46.49,7.51 46.59,7.51 v47.33,6.76
USB_DP  (via drill 0.35)
  Top 0.305: J1.3 47.06,4.31 47.06,6.07 D3.P$1 47.13,7.53 47.63,7.53 47.68,7.48 49.22,7.48 v49.23,7.46
  Bottom 0.305: C1.1 51.28,9.4 R5.1 49.28,7.51 v49.23,7.46
V_BAT
  Bottom 2.54: 8.15,10.6 CONV_3V3.VIN | CONV_6V.3 10.69,13.14 8.15,10.6 | D8.1 3.7,15.05 8.15,10.6
VCC  (via drill 0.35)
  Top 0.203: IMU.8 26.68,21.61 v27.38,22.32 | v23.68,20 23.89,20.21 IMU.13 | v24.07,10.77
  Top 0.254: IMU.1 27.75,18.08 v28.26,18.08 | U1.14 49.6,14.56 v50.89,14.56 | D7.P$1 51.77,10.73 v51.11,10.73
  Top 0.305: v24.07,10.77 MOTOR_DRIVER.20 22.58,10.8 v21.32,10.8 | 44.68,17.03 U1.3 v43.34,17.07 | C12.1 37.23,14.54 | U3.2 39.65,13.58 v42.17,13.58 | v42.17,10.83 v39.51,10.83 v39.5,10.84 | v38.79,14.87 40.83,14.87 v40.88,14.82 | v40.88,12.79 40.85,12.76 v38.77,12.76
  Top 0.406: C9.1 32.01,40.64 U2.2 30.07,40.5 29.55,39.98 v29.55,39.03
  VCC 0.406: 33.78,40.06 32.29,40.06
  Bottom 0.203: C19.1 24.16,20 v23.68,20 | C16.1 24.08,10.8 v24.08,10.77 v24.07,10.77
  Bottom 0.254: v51.11,10.73 51.32,10.93 51.32,11.27 51.29,11.25 51.29,14.16 v50.89,14.56
  Bottom 0.305: C15.1 21.32,10.59 v21.32,10.8 | 44.78,17.25 C3.1 44.46,17.07 v43.34,17.07
  Bottom 0.406: C19.1 C21.1 25.08,16.77 v24.81,16.51 | C8.1 29.66,39.13 v29.55,39.03
  other vias: 55.61,31.88 55.48,23.31 54.4,14.87 54.37,18.1 37.21,14.56 37.21,12.12 40.49,15.94 42.2,15.91 36.84,15.96 36.75,10.68 33.78,40.64
  pour VCC: -0.27,42.86 58.15,42.86 58.15,-0.32 -0.27,-0.32

## Text on the board
tPlace: RX | TX | 3.3v | VIN | GND | VOUT | U3
bNames: Bolt v1.1